# Altium PCB mini-ET.PcbDoc (part 1 of 2)
Units mil, origin at the board's own origin, x right, y up, seen from the top; angles counter-clockwise.
Board outline 6299 x 3937 mil, 4 copper layers (TopLayer, Gnd, Power, BottomLayer); 129 components, 151 nets, 650 pads, 100 vias.
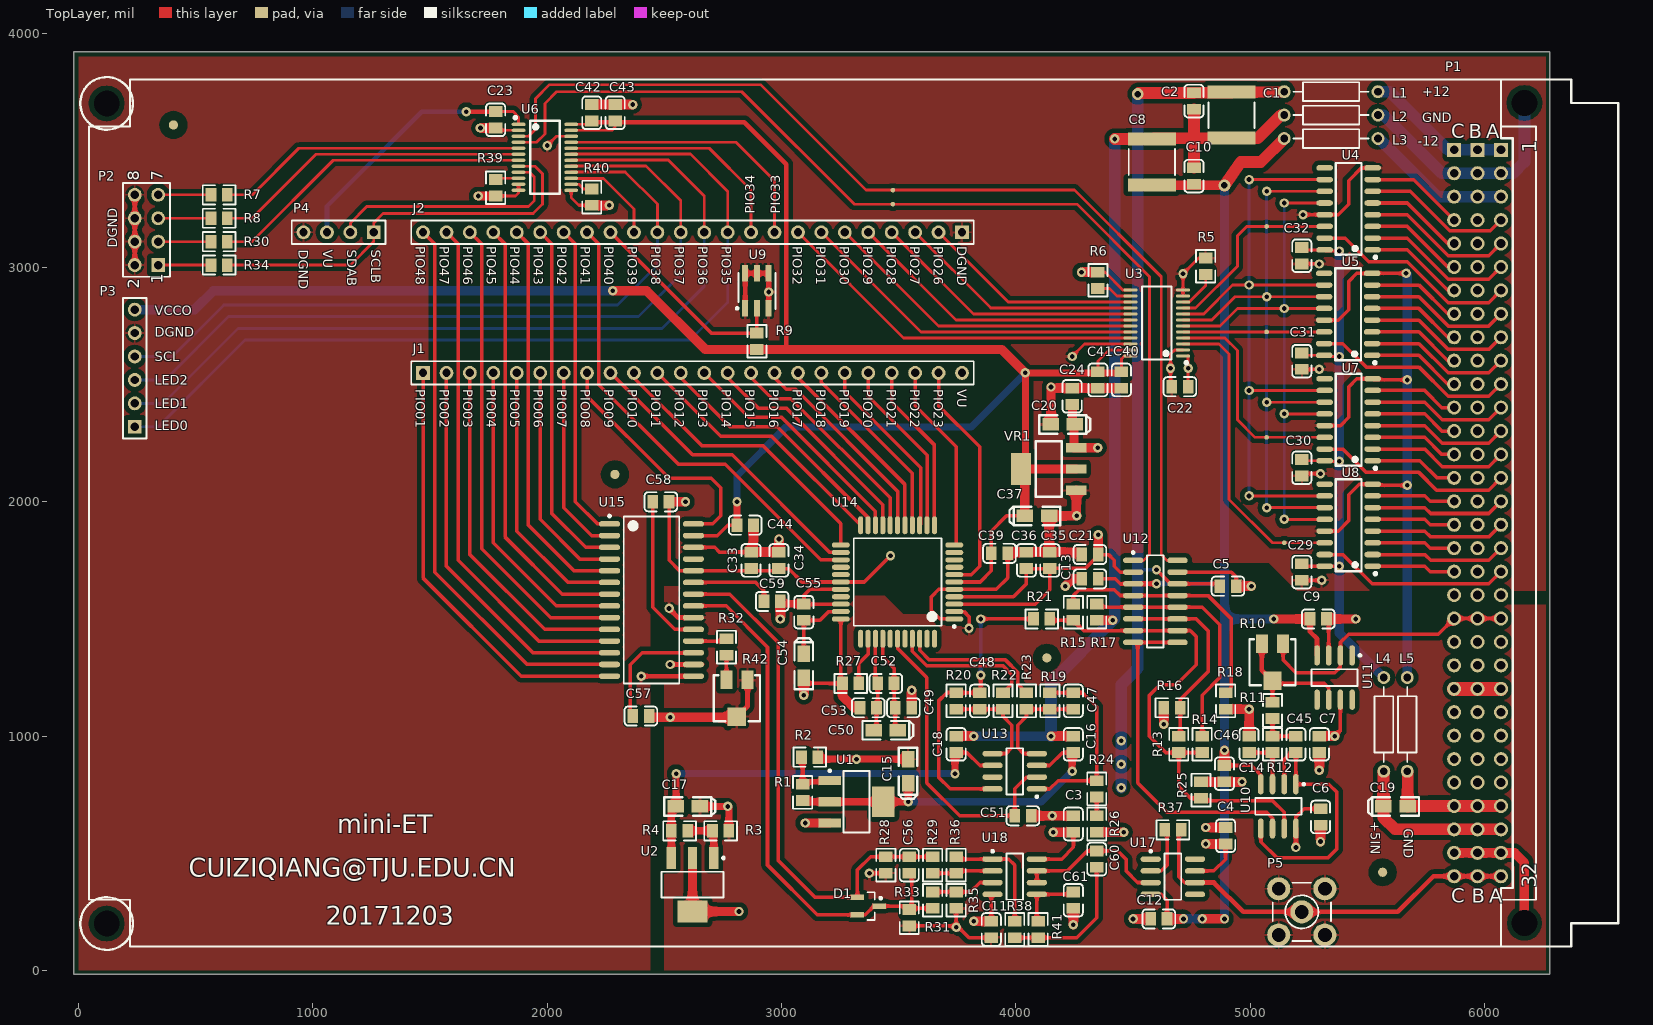
[diagram p0: TopLayer view]
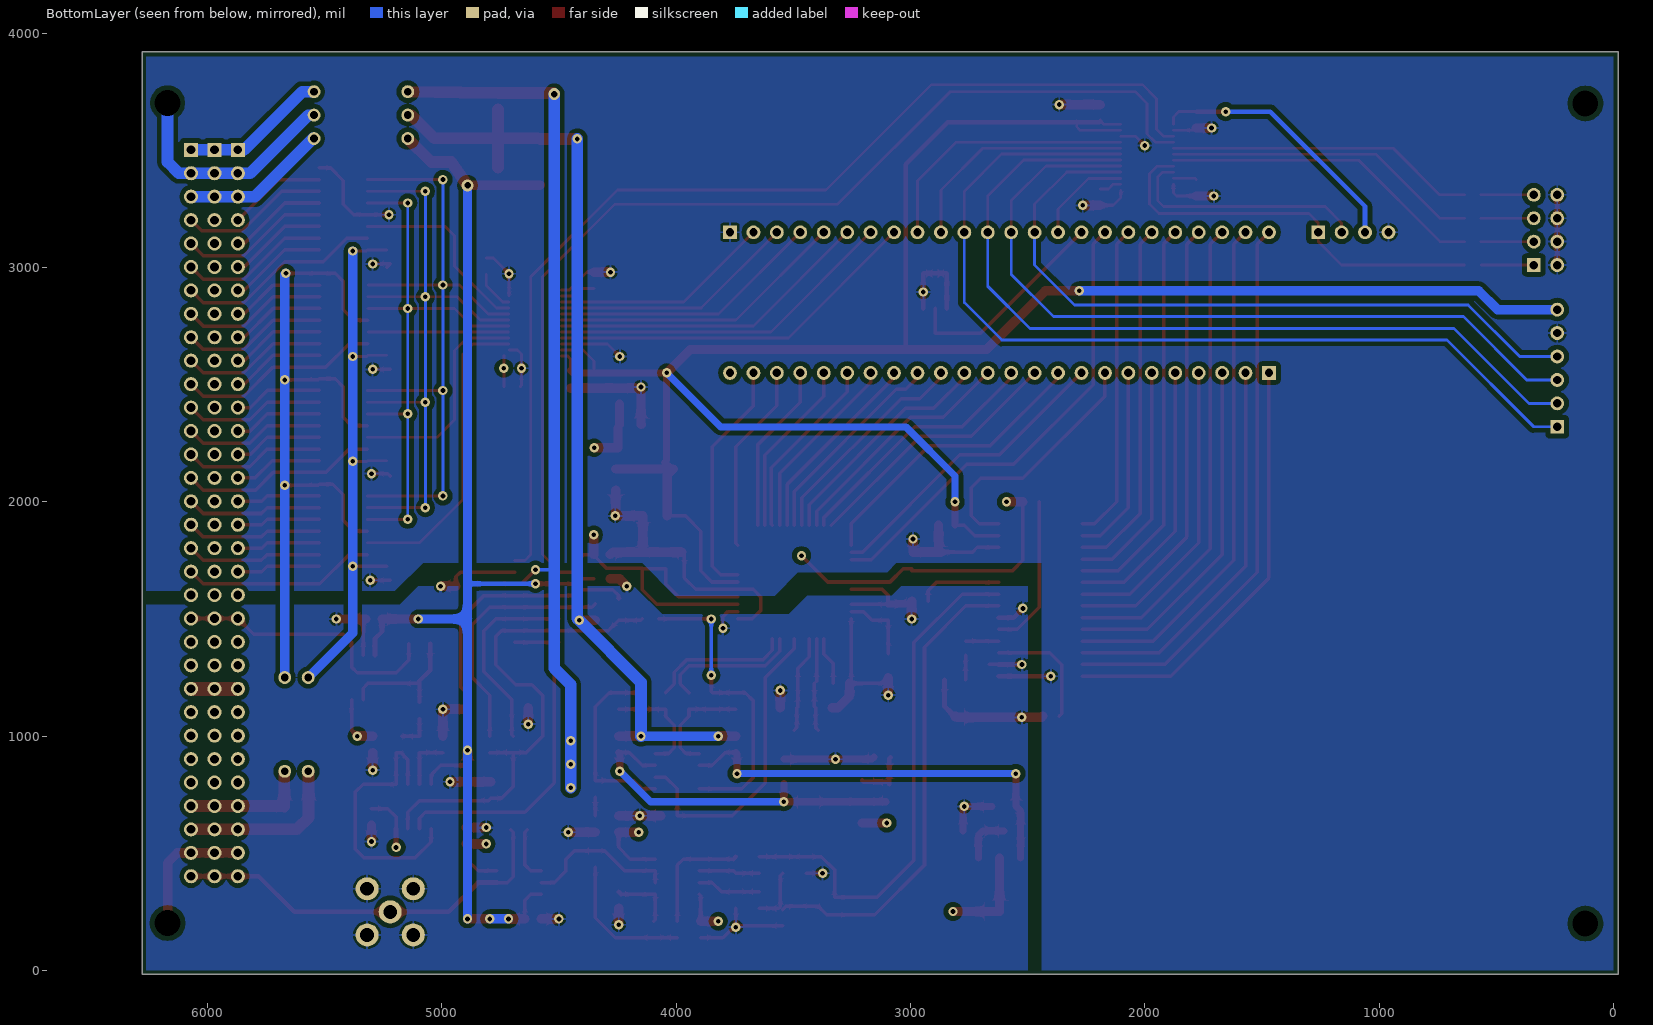
[diagram p1: BottomLayer view, seen from below]
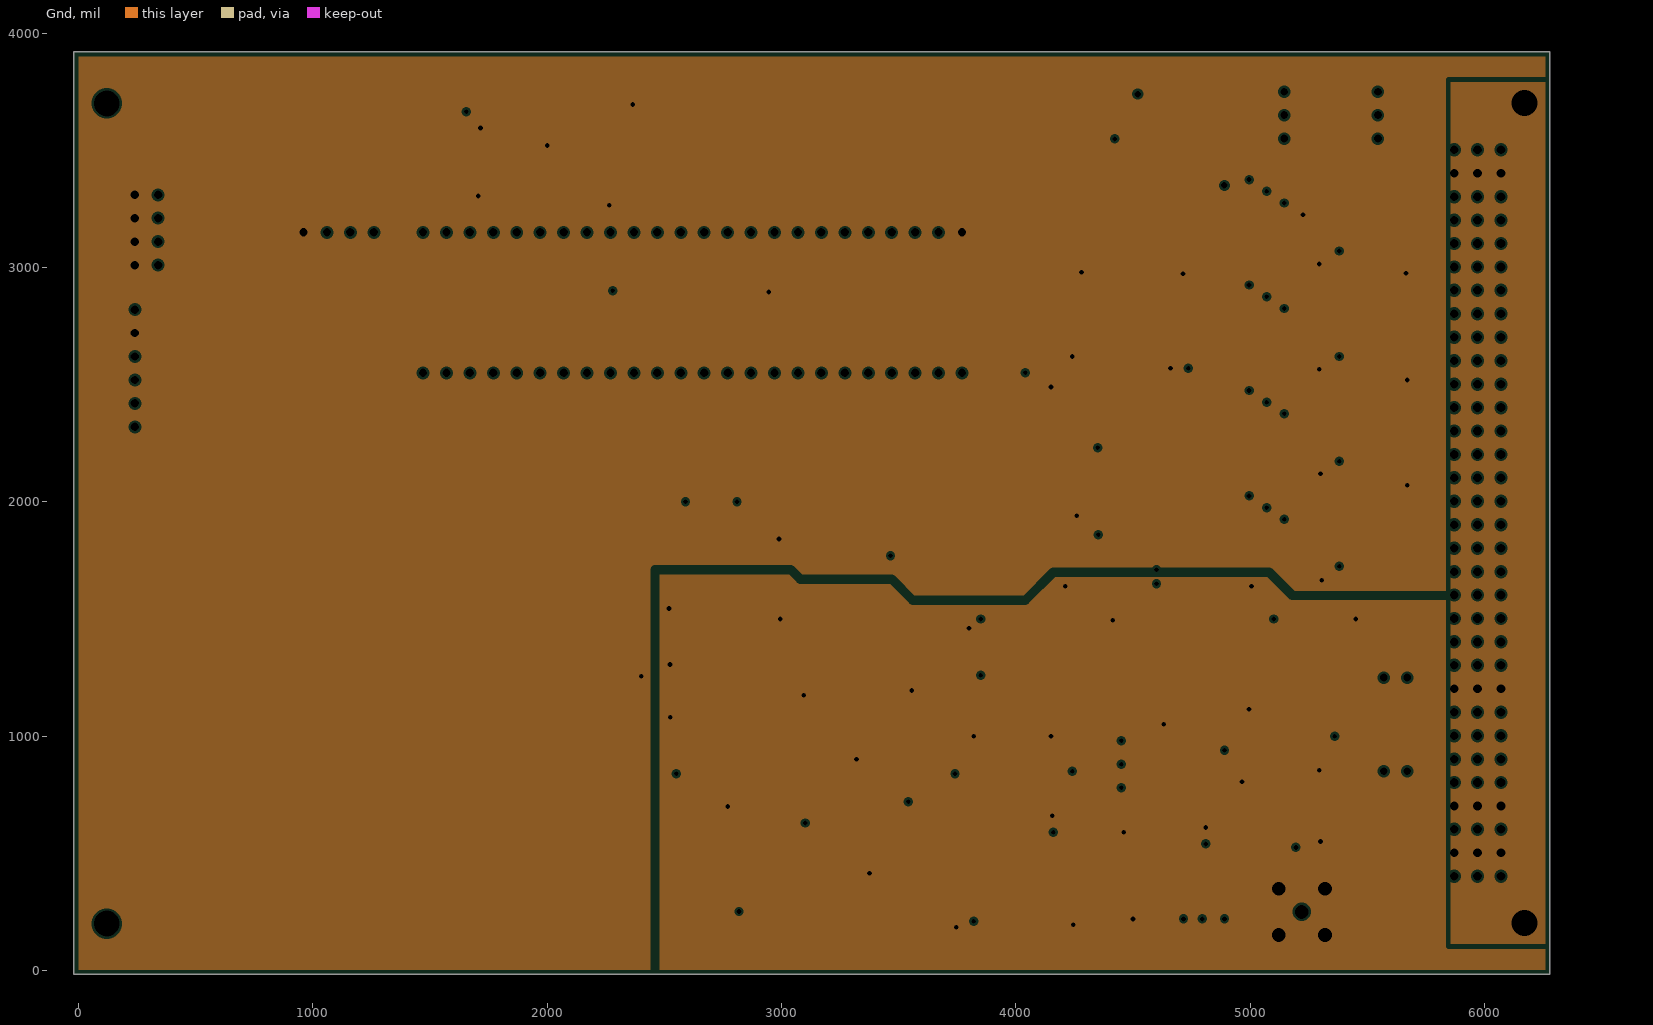
[diagram p2: Gnd, clearances drawn from the general rule]
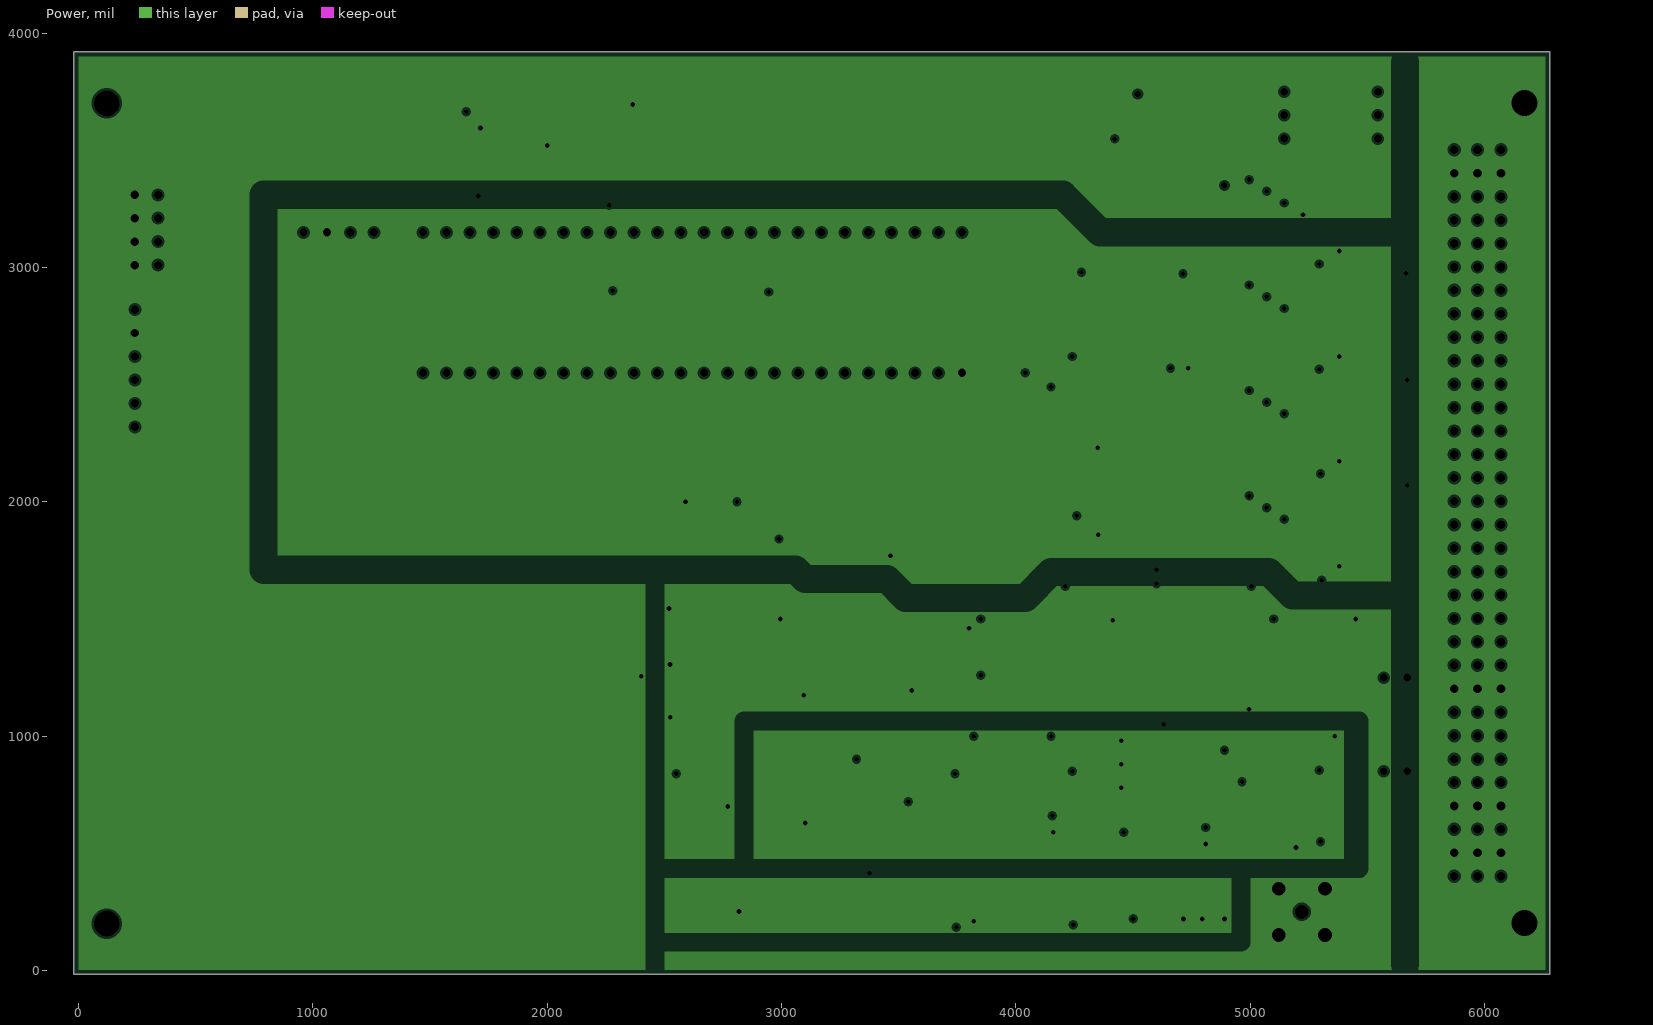
[diagram p3: Power, clearances drawn from the general rule]
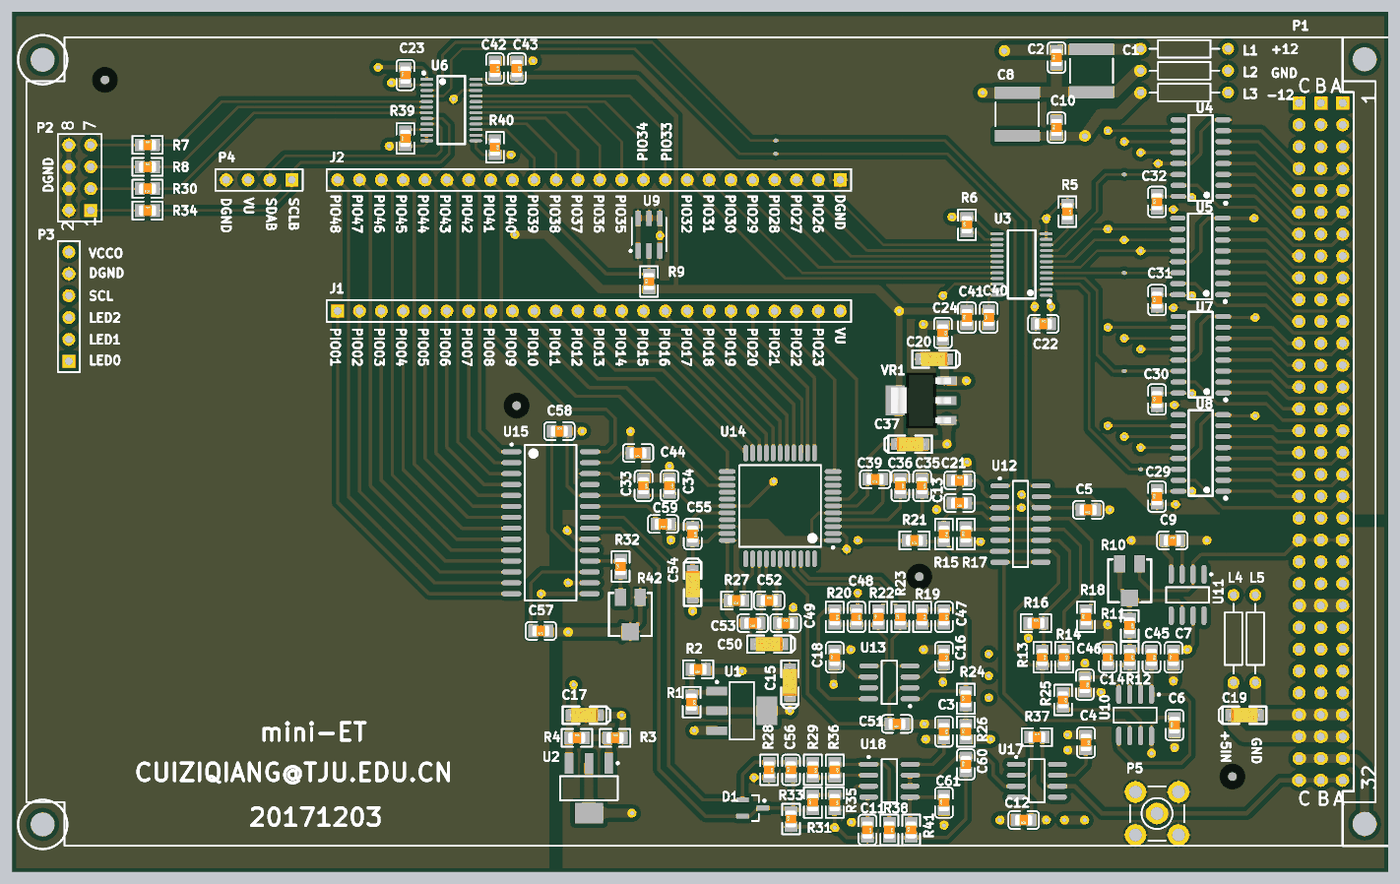
[diagram p5: 3D render of the assembled board from above, using the file's embedded part models]

## Layer stack, top to bottom
TopSolder: solder mask 0.4, Solder Resist, Dk 3.5
TopLayer: signal copper 1.4
Dielectric1: core 12.6, FR-4, Dk 4.8
Gnd: plane copper 1.4, net (Multiple Nets)
Dielectric6: prepreg 12.6, FR-4, Dk 4.8
Power: plane copper 1.4, net VU
Dielectric5: core 12.6, FR-4, Dk 4.8
BottomLayer: signal copper 1.4
BottomSolder: solder mask 0.4, Solder Resist, Dk 3.5

## Board outline
-20,-17 6279,-17 6279,3920 -20,3920

## Design rules (kind name [scope] priority, off if disabled: settings)
Clearance Clearance_10 [InNamedPolygon('toplayer-DGND')] p1: gap=20
Clearance Clearance_9 [InNamedPolygon('bottomlayer-DGND')] p2: gap=20
Clearance Clearance_8 [InNamedPolygon('bottomlayer-AGND')] p3: gap=20
Clearance Clearance_7 [InNamedPolygon('bottomlayer-AGND')] p4: gap=20
Clearance Clearance_6 [InNamedPolygon('toplayer-AGND')] p5: gap=20
Clearance Clearance_5 [InNamedPolygon('toplayer-AGND')] p6: gap=10
Clearance Clearance_4 [InNamedPolygon('toplayer-AGND')] p7: gap=10
Clearance Clearance_3 [InNamedPolygon('toplayer-DGND')] p8: gap=10
Clearance Clearance_2 [InNamedPolygon('toplayer-AGND')] p9: gap=10
Clearance Clearance_1 [InNamedPolygon('toplayer-DGND')] p10: gap=10
Clearance [All] p11: gap=8
DiffPairsRouting [All] p1: maxlimit=10 minlimit=10 mostfreqgap=10 toplayer_minwidth=15 toplayer_maxwidth=15 toplayer_prefwidth=15 bottomlayer_minwidth=15 bottomlayer_maxwidth=15 bottomlayer_prefwidth=15 maxuncoupledlength=500
FabricationTestPointUsage TestPointUsage [All] p1: valid=0 allowmultiple=FALSE
FabricationTestpoint Testpoint [All] p1: side=3 testpointundercomponent=TRUE minsize=40 maxsize=100 preferedsize=60 minholesize=20 maxholesize=40 preferedholesize=32 testpointgrid=1 allowsidetop=TRUE allowsidebottom=TRUE usegrid=TRUE gridtolerance=0.01
PlaneClearance [All] p1: clearance=10
PlaneConnect [All] p1: planeconnectstyle=Relief reliefexpansion=20 reliefentries=4 reliefconductorwidth=10 reliefairgap=10
PolygonConnect [All] p1: connectstyle=Relief reliefconductorwidth=10 reliefentries=4 polygonreliefangle="90 Angle" airgapwidth=10
RoutingVias [All] p1: holewidth=20 width=40 viastyle="Through Hole" minholewidth=20 minwidth=30 maxholewidth=40 maxwidth=80
SilkToSolderMaskClearance SilkscreenOverComponentPads [IsPad] p1: minsilkscreentomaskgap=10 clearancetoexposedcopper=TRUE
SolderMaskExpansion [All] p1: expansion=2
Width [All] p1: maxlimit=100 minlimit=10 preferedwidth=10
Width Width_1 [InNetClass('pp')] p2 off: maxlimit=100 minlimit=10 preferedwidth=50
23 further rules are at their usual default settings.

## Classes and differential pairs
component class ET-AIO: c C45 C46 C47 C48 C49 C50 C51 C52 C53 C54 C55 R10 R11 R12 R13 R14 R15 R16 R17 R18 R19 R20 R21 R22 R23 R24 R25 R26 R27 U10 U11 U12 U13 U14
component class ET-IO: J1 J2 P2 P3 P4 R5 R6 R7 R8 R9 R30 R34 R39 R40 U3 U4 U5 U6 U7 U8 U9
component class ET-DAC: C56 C57 C58 C59 C60 C61 D1 P5 R28 R29 R31 R32 R33 R35 R36 R37 R38 R41 R42 U15 U17 U18
component class ET-POWER: C1 C2 C3 C4 C5 C6 C7 C8 C9 C10 C11 C12 C13 C14 C15 C16 C17 C18 C19 C20 C21 C22 C23 C24 C29 C30 C31 C32 C33 C34 C35 C36 C37 C39 C40 C41 C42 C43 C44 L1 L2 L3 L4 L5 P1 R1 R2 R3 R4 U1 U2 VR1
differential pair VIN: +VIN_P -VIN_N
differential pair OUT: +OUT_P -OUT_N

## Components (designator, comment, footprint, x,y, rotation, side; value= is the part's Value field where it differs from the comment)
C1 "Cap Pol3" 2220 4920,3650 r270 top
C2 "100nF(104) 10% 50V" LC-0805_C 4760,3710 r90 top
C3 "100nF(104) 10% 50V" LC-0805_C 4245,625 r270 top
C4 "100nF(104) 10% 50V" LC-0805_C 4895,575 r270 top
C5 "100nF(104) 10% 50V" LC-0805_C 4905.04,1640 r180 top
C6 "100nF(104) 10% 50V" LC-0805_C 5300,654.96 r90 top
C7 "100nF(104) 10% 50V" LC-0805_C 5295,964.96 r90 top
C8 "Cap Pol3" 2220 4580,3450 r270 top
C9 "100nF(104) 10% 50V" LC-0805_C 5290.04,1500 r0 top
C10 "100nF(104) 10% 50V" LC-0805_C 4760,3390 r90 top
C11 "100nF(104) 10% 50V" LC-0805_C 3895,175 r270 top
C12 "100nF(104) 10% 50V" LC-0805_C 4610,220 r180 top
C13 "100nF(104) 10% 50V" LC-0805_C 4316.06,1671.06 r180 top
C14 "100nF(104) 10% 50V" LC-0805_C 4890,840 r270 top
C15 "10uF (106) ±10% 16V" LC-CASE-A_3216 3540,850 r270 top
C16 "100nF(104) 10% 50V" LC-0805_C 4245,964.96 r270 top
C17 "10uF (106) ±10% 16V" LC-CASE-A_3216 2600,700 r0 top
C18 "100nF(104) 10% 50V" LC-0805_C 3745,964.96 r90 top
C19 "10uF (106) ±10% 16V" LC-CASE-A_3216 5620,700 r180 top
C20 "10uF (106) ±10% 16V" LC-CASE-A_3216 4200,2330 r0 top
C21 "100nF(104) 10% 50V" LC-0805_C 4316.06,1775 r0 top
C22 "100nF(104) 10% 50V" LC-0805_C 4700,2491.06 r0 top
C23 "100nF(104) 10% 50V" LC-0805_C 1780,3630 r90 top
C24 "100nF(104) 10% 50V" LC-0805_C 4240,2450 r270 top
C29 "100nF(104) 10% 50V" LC-0805_C 5220,1700 r90 top
C30 "100nF(104) 10% 50V" LC-0805_C 5220,2145.04 r90 top
C31 "100nF(104) 10% 50V" LC-0805_C 5220,2600 r90 top
C32 "100nF(104) 10% 50V" LC-0805_C 5220,3050 r90 top
C33 "100nF(104) 10% 50V" LC-0805_C 2870,1750 r270 top
C34 "100nF(104) 10% 50V" LC-0805_C 2988.9,1750 r270 top
C35 "100nF(104) 10% 50V" LC-0805_C 4145,1750 r270 top
C36 "100nF(104) 10% 50V" LC-0805_C 4045,1750 r270 top
C37 "10uF (106) ±10% 16V" LC-CASE-A_3216 4090,1940 r180 top
C39 "100nF(104) 10% 50V" LC-0805_C 3930,1780 r180 top
C40 "100nF(104) 10% 50V" LC-0805_C 4450,2520 r90 top
C41 "100nF(104) 10% 50V" LC-0805_C 4350,2520 r90 top
C42 "100nF(104) 10% 50V" LC-0805_C 2190,3660 r270 top
C43 "100nF(104) 10% 50V" LC-0805_C 2290,3660 r270 top
C44 "100nF(104) 10% 50V" LC-0805_C 2845,1900 r180 top
C45 "10pF (100) 5% 50V" LC-0805_C 5195,964.96 r270 top
C46 "10pF (100) 5% 50V" LC-0805_C 4995,964.96 r270 top
C47 "10nF (103) 10% 50V" LC-0805_C 4245,1150 r270 top
C48 "10nF (103) 10% 50V" LC-0805_C 3845,1150 r270 top
C49 "100nF(104) 10% 50V" LC-0805_C 3520,1121.06 r0 top
C50 "10uF (106) ±10% 16V" LC-CASE-A_3216 3445,1025 r0 top
C51 "100nF(104) 10% 50V" LC-0805_C 4030,660 r180 top
C52 "100nF(104) 10% 50V" LC-0805_C 3445,1225 r0 top
C53 "100nF(104) 10% 50V" LC-0805_C 3370,1121.06 r180 top
C54 "10uF (106) ±10% 16V" LC-CASE-A_3216 3095,1300 r90 top
C55 "100nF(104) 10% 50V" LC-0805_C 3095,1528.94 r270 top
C56 "22pF (220) 5% 50V" LC-0805_C 3545,450 r90 top
C57 "100nF(104) 10% 50V" LC-0805_C 2400,1085.83 r180 top
C58 "100nF(104) 10% 50V" LC-0805_C 2484.96,2000 r0 top
C59 "100nF(104) 10% 50V" LC-0805_C 2959.96,1575 r180 top
C60 "10pF (100) 5% 50V" LC-0805_C 4345,475 r90 top
C61 "10pF (100) 5% 50V" LC-0805_C 4245,300 r90 top
D1 "1PS89SB74" SOT23_M 3370,275 r0 top
J1 "Header 24" HDR1X24 1470,2550 r0 top
J2 "Header 24" HDR1X24 3770,3150 r180 top
L1 "Inductor Adj" AXIAL-0.4 5345,3750 r180 top
L2 "Inductor Adj" AXIAL-0.4 5345,3650 r180 top
L3 "Inductor Adj" AXIAL-0.4 5345,3550 r180 top
L4 "Inductor Adj" AXIAL-0.4 5570,1050 r90 top
L5 "Inductor Adj" AXIAL-0.4 5670,1050 r90 top
P1 "CNVME96" CNVME96 6070,3502 r90 top locked
P2 "Header 4X2" HDR2X4 340,3010 r90 top
P3 "Header 6" HDR1X6 240,2320 r90 top
P4 "Header 4" HDR1X4 1260,3150 r180 top
P5 "SMB" SMB_V-RJ45 5220,250 r0 top
R1 "100Ω (1000) ±1%" LC-0805_R 3090,760 r270 top
R2 "300Ω (3000) ±1%" LC-0805_R 3120,910 r180 top
R3 "300Ω (3000) ±1%" LC-0805_R 2740,596.06 r0 top
R4 "100Ω (1000) ±1%" LC-0805_R 2564.96,596.06 r0 top
R5 "0Ω (0R0) ±1%" LC-0805_R 4810,3005.04 r270 top
R6 "0Ω (0R0) ±1%" LC-0805_R 4350,2945.04 r90 top
R7 "1KΩ (1001) ±1%" LC-0805_R 600,3310 r0 top
R8 "1KΩ (1001) ±1%" LC-0805_R 600,3210 r0 top
R9 "1KΩ (1001) ±1%" LC-0805_R 2895,2685 r90 top
R10 "2K" POT4MM-2 5095,1315 r270 top
R11 "33KΩ (3302) ±1%" LC-0805_R 5095,1110 r270 top
R12 "33KΩ (3302) ±1%" LC-0805_R 5095,964.96 r270 top
R13 "200Ω (2000) ±1%" LC-0805_R 4695,964.96 r270 top
R14 "1.5KΩ (1501) ±1%" LC-0805_R 4795,964.96 r270 top
R15 "3KΩ (3001) ±1%" LC-0805_R 4245,1528.94 r270 top
R16 "200Ω (2000) ±1%" LC-0805_R 4666.06,1121.06 r0 top
R17 "510Ω (5100) ±1%" LC-0805_R 4345,1528.94 r90 top
R18 "200Ω (2000) ±1%" LC-0805_R 4895,1150 r90 top
R19 "510Ω (5100) ±1%" LC-0805_R 4145,1150 r270 top
R20 "510Ω (5100) ±1%" LC-0805_R 3745,1150 r270 top
R21 "510Ω (5100) ±1%" LC-0805_R 4109.96,1500 r180 top
R22 "49.9Ω (49R9) ±1%" LC-0805_R 3945,1150 r90 top
R23 "49.9Ω (49R9) ±1%" LC-0805_R 4045,1150 r90 top
R24 "510Ω (5100) ±1%" LC-0805_R 4345,775 r90 top
R25 "49.9Ω (49R9) ±1%" LC-0805_R 4790,770 r270 top
R26 "15Ω (15R0) ±1%" LC-0805_R 4345,625 r90 top
R27 "2KΩ (2001) ±1%" LC-0805_R 3295,1225 r180 top
R28 "49.9Ω (49R9) ±1%" LC-0805_R 3445,450 r270 top
R29 "100Ω (1000) ±1%" LC-0805_R 3645,450 r270 top
R30 "1KΩ (1001) ±1%" LC-0805_R 600,3110 r180 top
R31 "100Ω (1000) ±1%" LC-0805_R 3645,300 r90 top
R32 "2KΩ (2001) ±1%" LC-0805_R 2765,1380 r90 top
R33 "49.9Ω (49R9) ±1%" LC-0805_R 3545,225 r90 top
R34 "1KΩ (1001) ±1%" LC-0805_R 600,3010 r0 top
R35 "1KΩ (1001) ±1%" LC-0805_R 3745,300 r270 top
R36 "1KΩ (1001) ±1%" LC-0805_R 3745,450 r270 top
R37 "510Ω (5100) ±1%" LC-0805_R 4670,600 r0 top
R38 "33KΩ (3302) ±1%" LC-0805_R 3995,175 r270 top
R39 "0Ω (0R0) ±1%" LC-0805_R 1780,3340 r90 top
R40 "0Ω (0R0) ±1%" LC-0805_R 2190,3300 r270 top
R41 "33KΩ (3302) ±1%" LC-0805_R 4095,175 r90 top
R42 "20K" POT4MM-2 2809.72,1161.26 r270 top
U1 "LM317AEMP/NOPB" MP04A_N 3320,720 r0 top
U2 "LM337IMP/NOPB" MP04A_N 2620,365.83 r270 top
U3 "SN74LVC4245APWRG4" LC-TSSOP-24 4601,2763 r90 top
U4 "74HC595D" LC-SOIC-16_150mil 5420,3250 r90 top
U5 "74HC595D" LC-SOIC-16_150mil 5417.64,2800 r90 top
U6 "SN74LVC4245APWRG4" LC-TSSOP-24 1990,3470 r270 top
U7 "74HC595D" LC-SOIC-16_150mil 5420,2350 r90 top
U8 "74HC595D" LC-SOIC-16_150mil 5420,1900 r90 top
U9 "DS2432P" TSOC6 2895,2900 r0 top
U10 "AD8066AR" SO-8_N 5120,700 r270 top
U11 "AD817AR" SO-8_N 5360,1250 r270 top
U12 "MAX309ESE" NSO16_N 4595,1575 r0 top
U13 "AD8138ARZ" SO-8_N 3995,850 r180 top
U14 "AD9240AS" S-44-MQFP_N 3495,1657.68 r180 top
U15 "AD9764ARZ" RW-28_N 2445,1580.71 r0 top
U17 "AD817AR" SO-8_N 4670,400 r0 top
U18 "AD8066AR" SO-8_N 3995,400 r0 top
VR1 "AMS1117-3.3" LC-SOT-223 4140,2140 r0 top

## Footprints (in the part's own frame and the unit in brackets; to place one, negate y for a bottom-side part, rotate by r counter-clockwise, add the part's x,y. Pads: shape width x height; smd on the part's side, far side on the other; paste and mask are expansions set on the pad)
2220 [mm] "Chip Capacitor, Body 5.7x5.0mm, IPC High Density"
  rect 1.4x5.2 smd: 1(-2.5,0) 2(2.5,0)
  silkscreen extent -1.4,-2.5 1.4,2.5, body extent -2.95,-2.63 2.95,2.63, height 1.4
AXIAL-0.4 [mm] "Axial Device, Thru-Hole; 2 Leads; 0.4 in Pin Spacing"
  round 1.4 hole 0.85: 1(-5.08,0) 2(5.08,0)
  silkscreen extent -4.06,-1.02 4.06,1.02
CNVME96 [mil]
  round 50 hole 110: 97(200,-100) 98(-3300,-100)
  rect 60x60 / inner round 60 / far side rect 60x60 hole 37: A1(0,0) B1(0,100) C1(0,200)
  round 60 hole 37: A2(-100,0) A3(-200,0) A4(-300,0) A5(-400,0) A6(-500,0) A7(-600,0) A8(-700,0) A9(-800,0) A10(-900,0) A11(-1000,0) A12(-1100,0) A13(-1200,0) A14(-1300,0) A15(-1400,0) A16(-1500,0) A17(-1600,0) A18(-1700,0) A19(-1800,0) A20(-1900,0) A21(-2000,0) A22(-2100,0) A23(-2200,0) A24(-2300,0) A25(-2400,0) A26(-2500,0) A27(-2600,0) A28(-2700,0) A29(-2800,0) A30(-2900,0) A31(-3000,0) A32(-3100,0) B2(-100,100) B3(-200,100) B4(-300,100) B5(-400,100) B6(-500,100) B7(-600,100) B8(-700,100) B9(-800,100) B10(-900,100) B11(-1000,100) B12(-1100,100) B13(-1200,100) B14(-1300,100) B15(-1400,100) B16(-1500,100) B17(-1600,100) B18(-1700,100) B19(-1800,100) B20(-1900,100) B21(-2000,100) B22(-2100,100) B23(-2200,100) B24(-2300,100) B25(-2400,100) B26(-2500,100) B27(-2600,100) B28(-2700,100) B29(-2800,100) B30(-2900,100) B31(-3000,100) B32(-3100,100) C2(-100,200) C3(-200,200) C4(-300,200) C5(-400,200) C6(-500,200) C7(-600,200) C8(-700,200) C9(-800,200) C10(-900,200) C11(-1000,200) C12(-1100,200) C13(-1200,200) C14(-1300,200) C15(-1400,200) C16(-1500,200) C17(-1600,200) C18(-1700,200) C19(-1800,200) C20(-1900,200) C21(-2000,200) C22(-2100,200) C23(-2200,200) C24(-2300,200) C25(-2400,200) C26(-2500,200) C27(-2600,200) C28(-2700,200) C29(-2800,200) C30(-2900,200) C31(-3000,200) C32(-3100,200)
  silkscreen extent -3400,-500 300,0
HDR1X4 [mm] "Connector; Header; 4 Position"
  rect 1.5x1.5 hole 0.9: 1(0,0)
  round 1.5 hole 0.9: 2(2.54,0) 3(5.08,0) 4(7.62,0)
  silkscreen extent -1.27,-1.27 8.89,1.27
HDR1X6 [mm] "Connector; Header; 6 Position"
  rect 1.5x1.5 hole 0.9: 1(0,0)
  round 1.5 hole 0.9: 2(2.54,0) 3(5.08,0) 4(7.62,0) 5(10.16,0) 6(12.7,0)
  silkscreen extent -1.27,-1.27 13.97,1.27
HDR1X24 [mm] "Connector; Header; 24 Position"
  rect 1.5x1.5 hole 0.9: 1(0,0)
  round 1.5 hole 0.9: 2(2.54,0) 3(5.08,0) 4(7.62,0) 5(10.16,0) 6(12.7,0) 7(15.24,0) 8(17.78,0) 9(20.32,0) 10(22.86,0) 11(25.4,0) 12(27.94,0) 13(30.48,0) 14(33.02,0) 15(35.56,0) 16(38.1,0) 17(40.64,0) 18(43.18,0) 19(45.72,0) 20(48.26,0) 21(50.8,0) 22(53.34,0) 23(55.88,0) 24(58.42,0)
  silkscreen extent -1.27,-1.27 59.69,1.27
HDR2X4 [mm] "Connector; Header; 4x2 Position"
  rect 1.5x1.5 hole 0.9: 1(0,0)
  round 1.5 hole 0.9: 2(0,2.54) 3(2.54,0) 4(2.54,2.54) 5(5.08,0) 6(5.08,2.54) 7(7.62,0) 8(7.62,2.54)
  silkscreen extent -1.27,-1.27 8.89,3.81
LC-0805_C [mm]
  rect 1.16x1.47 smd: 1(-0.89,0) 2(0.89,0)
  silkscreen extent -1.77,-1.04 1.77,1.04, body extent -1,-0.62 1,0.63, height 0.77
LC-0805_R [mm]
  rect 1.16x1.47 smd: 1(-0.89,0) 2(0.89,0)
  silkscreen extent -1.77,-1.04 1.77,1.03, body extent -1,-0.65 1,0.65, height 0.77
LC-CASE-A_3216 [mm]
  rect 1.8x1.35 smd: 1(1.31,0) 2(-1.31,0)
  silkscreen extent -2.54,-1 2.97,1, body extent -1.7,-0.84 1.7,0.84, height 1.71
LC-SOIC-16_150mil [mm]
  oval 0.6x1.8 smd: 1(-4.445,-2.6) 2(-3.175,-2.6) 3(-1.905,-2.6) 4(-0.635,-2.6) 5(0.635,-2.6) 6(1.905,-2.6) 7(3.175,-2.6) 8(4.445,-2.6) 9(4.445,2.6) 10(3.175,2.6) 11(1.905,2.6) 12(0.635,2.6) 13(-0.635,2.6) 14(-1.905,2.6) 15(-3.175,2.6) 16(-4.445,2.6)
  silkscreen extent -5.4,-3.05 4.97,1.4
LC-SOT-223 [mm]
  rect 2.2x1 smd: 1(3,-2.3) 2(3,0) 3(3,2.3)
  rect 2.2x3.5 smd: 2(-3,0)
  silkscreen extent -1.4,-3 1.4,3, body extent -3.49,-3.24 3.49,3.24, height 1.64
LC-TSSOP-24 [mm]
  oval 0.35x1.5 smd: 1(-3.575,-2.85) 2(-2.925,-2.85) 3(-2.275,-2.85) 4(-1.625,-2.85) 5(-0.975,-2.85) 6(-0.325,-2.85) 7(0.325,-2.85) 8(0.975,-2.85) 9(1.625,-2.85) 10(2.275,-2.85) 11(2.925,-2.85) 12(3.575,-2.85) 13(3.575,2.85) 14(2.925,2.85) 15(2.275,2.85) 16(1.625,2.85) 17(0.975,2.85) 18(0.325,2.85) 19(-0.325,2.85) 20(-0.975,2.85) 21(-1.625,2.85) 22(-2.275,2.85) 23(-2.925,2.85) 24(-3.575,2.85)
  silkscreen extent -4.45,-3.35 3.95,1.6
MP04A_N [mm] "SOT223, 4-Leads, Body 6.5x3.5mm, Pitch 2.3mm, Lead Span 7mm, IPC Medium Density"
  rect 2.4x1 smd: 1(-2.9,2.3) 2(-2.9,0) 3(-2.9,-2.3)
  rect 2.4x3.3 smd: 4(2.9,0)
  silkscreen extent -3.02,-3.35 1.4,3.47, body extent -1.85,-3.35 1.85,3.35, height 1.8
NSO16_N [mm] "SOIC, 16-Leads, Body 9.9x3.9mm, Pitch 1.27mm, IPC Medium Density"
  oval 2.2x0.6 smd: 1(-2.4,4.445) 2(-2.4,3.175) 3(-2.4,1.905) 4(-2.4,0.635) 5(-2.4,-0.635) 6(-2.4,-1.905) 7(-2.4,-3.175) 8(-2.4,-4.445) 9(2.4,-4.445) 10(2.4,-3.175) 11(2.4,-1.905) 12(2.4,-0.635) 13(2.4,0.635) 14(2.4,1.905) 15(2.4,3.175) 16(2.4,4.445)
  silkscreen extent -2.52,-5 0.9,5.42, body extent -2,-5 2,5, height 1.75
POT4MM-2 [mm] "Square Trimming Potentiometer"
  rect 2x1.3 smd: CCW(-2,-1.15) CW(-2,1.15)
  rect 2x2 smd: W(2,0)
  silkscreen extent -2.5,-2.5 2.5,2.5
RW-28_N [mm] "SOIC, 28-Leads, Body 17.9x7.5mm, Pitch 1.27mm, IPC Medium Density"
  oval 2.3x0.6 smd: 1(-4.55,8.255) 2(-4.55,6.985) 3(-4.55,5.715) 4(-4.55,4.445) 5(-4.55,3.175) 6(-4.55,1.905) 7(-4.55,0.635) 8(-4.55,-0.635) 9(-4.55,-1.905) 10(-4.55,-3.175) 11(-4.55,-4.445) 12(-4.55,-5.715) 13(-4.55,-6.985) 14(-4.55,-8.255) 15(4.55,-8.255) 16(4.55,-6.985) 17(4.55,-5.715) 18(4.55,-4.445) 19(4.55,-3.175) 20(4.55,-1.905) 21(4.55,-0.635) 22(4.55,0.635) 23(4.55,1.905) 24(4.55,3.175) 25(4.55,4.445) 26(4.55,5.715) 27(4.55,6.985) 28(4.55,8.255)
  silkscreen extent -4.67,-9.05 3,9.23, body extent -3.8,-9.05 3.8,9.05, height 2.65
S-44-MQFP_N [mm] "QFP, 44-Leads, Body 10x10mm, Pitch 0.8mm, IPC Medium Density"
  oval 1.95x0.55 smd: 1(-6.15,4) 2(-6.15,3.2) 3(-6.15,2.4) 4(-6.15,1.6) 5(-6.15,0.8) 6(-6.15,0) 7(-6.15,-0.8) 8(-6.15,-1.6) 9(-6.15,-2.4) 10(-6.15,-3.2) 11(-6.15,-4) 23(6.15,-4) 24(6.15,-3.2) 25(6.15,-2.4) 26(6.15,-1.6) 27(6.15,-0.8) 28(6.15,0) 29(6.15,0.8) 30(6.15,1.6) 31(6.15,2.4) 32(6.15,3.2) 33(6.15,4)
  oval 0.55x1.95 smd: 12(-4,-6.15) 13(-3.2,-6.15) 14(-2.4,-6.15) 15(-1.6,-6.15) 16(-0.8,-6.15) 17(0,-6.15) 18(0.8,-6.15) 19(1.6,-6.15) 20(2.4,-6.15) 21(3.2,-6.15) 22(4,-6.15) 34(4,6.15) 35(3.2,6.15) 36(2.4,6.15) 37(1.6,6.15) 38(0.8,6.15) 39(0,6.15) 40(-0.8,6.15) 41(-1.6,6.15) 42(-2.4,6.15) 43(-3.2,6.15) 44(-4,6.15)
  silkscreen extent -6.28,-4.75 4.75,4.95, body extent -5,-5 5,5, height 2.45
SMB_V-RJ45 [mm] "Connector; SMB Straight"
  round 2.5 hole 1.5: 1(0,0) 2(-2.5,-2.5) 2(-2.5,2.5) 2(2.5,-2.5) 2(2.5,2.5)
  silkscreen extent -3.15,-3.15 3.15,3.15
SO-8_N [mm] "SOIC, 8-Leads, Body 4.9x3.9mm, Pitch 1.27mm, IPC Medium Density"
  oval 2.2x0.6 smd: 1(-2.4,1.905) 2(-2.4,0.635) 3(-2.4,-0.635) 4(-2.4,-1.905) 5(2.4,-1.905) 6(2.4,-0.635) 7(2.4,0.635) 8(2.4,1.905)
  silkscreen extent -2.52,-2.5 0.9,2.88, body extent -1.95,-2.45 1.95,2.45, height 1.75
SOT23_M [mm] "SOT23, 3-Leads, Body 2.9x1.3mm, Pitch 0.95mm, Lead Span 2.3mm - Reverse Pinning, IPC Low Density"
  rect 1.45x0.6 smd: 1(1.175,0) 2(-1.175,-0.95) 3(-1.175,0.95)
  silkscreen extent -0.1,-1.5 1.48,1.5, body extent -0.7,-1.5 0.7,1.5, height 1.1
TSOC6 [mm] "Small Outline; 6 C-Bend Leads; Body Width 3.8 mm; Pitch 1.27 mm"
  rect 0.65x1.8 smd: 1(-1.27,-1.9) 2(0,-1.9) 3(1.27,-1.9) 4(1.27,1.9) 5(0,1.9) 6(-1.27,1.9)
  silkscreen extent -2.27,-2.02 2,1.95

## Part data
C1 C8: "Polarized Capacitor (Surface Mount)"
C2 C3 C4 C5 C6 C7 C9 C10 C11 C12 C13 C14 C16 C18 C21 C22 C23 C24 C29 C30 C31 C32 C33 C34 C35 C36 C39 C40 C41 C42 C43 C44 C49 C51 C52 C53 C55 C57 C58 C59: library part "0805 100nF(104) 10% 50V", "贴片电容"
C15 C17 C19 C20 C37 C50 C54: library part "3216 10uF (106) 10% 16V", "钽电容"
C45 C46 C60 C61: library part "0805 10pF (100) 5% 50V", "贴片电容"
C47 C48: library part "0805 10nF (103) 10% 50V", "贴片电容"
C56: library part "0805 22pF (220) 5% 50V", "贴片电容"
D1: "Schottky Barrier Double Diode"
J1 J2: "Header, 24-Pin"
L1 L2 L3 L4 L5: "Adjustable Inductor"
P1: "96-Pin Connector (3x32 2.54mm grid)"
P2: "Header, 4-Pin, Dual row"
P3: "Header, 6-Pin"
P4: "Header, 4-Pin"
P5: "SMB Straight Connector"
R1 R4 R29 R31: library part "0805 100Ω (1000) 1%", "贴片电阻"
R2 R3: library part "0805 300Ω (3000) 1%", "贴片电阻"
R5 R6 R39 R40: library part "0805 0Ω (0R0) 1%", "贴片电阻"
R7 R8 R9 R30 R34 R35 R36: library part "0805 1KΩ (1001) 1%", "贴片电阻"
R10 R42: library part "RPot SM", "Square Trimming Potentiometer"
R11 R12 R38 R41: library part "0805 33KΩ (3302) 1%", "贴片电阻"
R13 R16 R18: library part "0805 200Ω (2000) 1%", "贴片电阻"
R14: library part "0805 1.5KΩ (1501) 1%", "贴片电阻"
R15: library part "0805 3KΩ (3001) 1%", "贴片电阻"
R17 R19 R20 R21 R24 R37: library part "0805 510Ω (5100) 1%", "贴片电阻"
R22 R23 R25 R28 R33: library part "0805 49.9Ω (49R9) 1%", "贴片电阻"
R26: library part "0805 15Ω (15R0) 1%", "贴片电阻"
R27 R32: library part "0805 2KΩ (2001) 1%", "贴片电阻"
U1: "3-Terminal Adjustable Regulator, 4-pin SOT-223, Pb-Free"
U2: "3-Terminal Adjustable Negative Regulator, 4-pin SOT-223, Pb-Free"
U3 U4 U5 U6 U7 U8: "74系列逻辑芯片"
U9: library part DS2430AP, "256-Bit 1-Wire EEPROM"
U10 U18: library part AD8056AR, "Low Cost, 300MHz Voltage Feedback Amplifier"
U11 U17: "High-Speed, Low-Power Wide Supply Range Amplifier"
U12: "Precision, Dual 4-Channel, High-Performance, CMOS Analog Multiplexer"
U14: "Complete 14-Bit, 10 MSPS Monolithic A/D Converter, 44-Pin MQFP, Industrial"
U15: "Single 14-Bit TxDAC, 125 Msps, -40 to +85 degC, RW-28, Pb-Free, Tube"
VR1: library part "SOT-223 AMS1117-3.3", "低压差线性稳压(LDO)"

## Free pads (board coordinates)
  round 50 hole 110: 1(120,3700) 2(120,200)
  round 39.37 smd mask+39.37: 1(405,3608) 9(2289,2117) 10(4132,1334) 11(5565,419)
  round 20 smd: 3(5070,3175) 4(5070,2725) 5(5070,2275) 6(5145,1825) 7(3475,3330) 8(3475,3270)

## Via types
v1: diameter 40, hole 20, TopLayer to BottomLayer, 98 vias
v2: diameter 50, hole 28, TopLayer to BottomLayer, 2 vias

## Nets (pads, with @x,y where several pads share a name; then routed paths per layer and width w, separated by ;. In a path a pad name is that pad's centre, name@x,y a point inside that pad or via, vN(x,y) a via of type N, cw(c..) or ccw(c..) an arc to the next point about the centre after c; other vN are vias at no path point)
+5IN: C19.1 L4.1 P1.A30 P1.B30 P1.C30 | length 721.2
  TopLayer w50: L4.1@5570,850 5568.43,848.43 C19.1@5568.43,700 5568.43,651.57 5618,602 P1.C30@5870,602 P1.B30@5970,602 P1.A30@6070,602
+5V: C15.1 C16.2 R1.2 U1.2 U1.4 U13.3 | length 1527.6
  TopLayer w15: U13.3@4089.49,875 4145,875 4199.92,929.92 C16.2@4245,929.92
  TopLayer w30: R1.2@3104.96,720 U1.2@3205.83,720 U1.4@3434.17,720 v1(3540,720) C15.1@3540,798.43 ; v1(4240,850) 4240,924.92 C16.2@4245,929.92
  BottomLayer w30: v1(3540,720) 4110,720 v1(4240,850)
+12: C1.1 C2.2 C3.2 C4.2 C5.2 C6.2 C7.2 L1.2 U1.3 U10.8 U11.7 U12.14 U17.7 U18.8 | length 5213.7
  TopLayer w15: U18.8@4089.49,475 4195,475 4245,525 C3.2@4245,589.96 ; v1(4600,1710) 4660,1650 U12.14@4689.49,1650 C5.2@4880.04,1650 ; U17.7@4764.49,425 4845,425 4895,475 C4.2@4895,539.96 ; U10.8@5195,605.51 5195,655 5230,690 C6.2@5300,690 ; v1(5360,1000) 5385,1025 U11.7@5385,1155.51
  TopLayer w20: v1(5195,525) U10.8@5195,605.51
  TopLayer w40: v1(3100.55,629.45) U1.3@3205.83,629.45 ; v1(4160.04,589.96) C3.2@4245,589.96 ; v1(4810.04,539.96) C4.2@4895,539.96 ; C7.2@5295,1000 v1(5360,1000)
  TopLayer w50: v2(4520,3740) 4524.54,3744.54 4760.01,3744.54 4920.02,3746.81 L1.2@5145,3750
  BottomLayer w15: 4520,1710 v1(4600,1710)
  BottomLayer w50: v1(4450,780) v1(4450,880) v1(4450,980) 4450,1220 4520,1290 4520,1710 v2(4520,3740)
+12IN: L1.1 P1.A1 P1.B1 P1.C1 | length 627.7
  BottomLayer w50: L1.1@5545,3750 5595,3750 5843,3502 P1.C1@5870,3502 P1.B1@5970,3502 P1.A1@6070,3502
-5V: C17.2 C18.1 R4.1 U2.3 U13.6 | length 1828.8
  TopLayer w15: C18.1@3745,929.92 3790.08,929.92 3845,875 U13.6@3900.51,875
  TopLayer w30: U2.3@2529.45,480 2529.45,595.59 R4.1@2529.92,596.06 2529.92,681.5 C17.2@2548.43,700 2550,701.57 v1(2550,840) ; v1(3740,840) 3740,924.92 C18.1@3745,929.92
  BottomLayer w30: v1(2550,840) v1(3740,840)
-12: C8.2 C9.1 C10.1 C11.1 C12.1 C13.1 C14.1 L3.2 U2.2 U2.4 U10.4 U11.4 U12.3 U17.4 U18.4 | length 6169.6
  TopLayer w15: C11.1@3895,210.04 3895,319.49 U18.4@3900.51,325 ; C13.1@4351.1,1671.06 4423.94,1671.06 4445,1650 U12.3@4500.51,1650 ; U17.4@4575.51,325 4620,325 4645,300 4645,235.04 C12.1@4634.96,225 ; C14.1@4890,875.04 5004.96,875.04 5045,835 U10.4@5045,794.49
  TopLayer w20: U12.3@4500.51,1650 v1(4600,1650) ; C9.1@5255,1500 5255,1445 5285,1415 U11.4@5285,1344.49
  TopLayer w40: U2.2@2620,480 U2.4@2620,251.65 v1(2818.35,251.65) ; v1(3820.04,210.04) C11.1@3895,210.04 ; C8.2@4580,3351.57 4581.57,3350 v2(4890,3350) ; C12.1@4645.04,220 v1(4715,220) ; v1(4795,220) v1(4890,220) ; C14.1@4890,875.04 v1(4890,940) ; v1(5100,1500) C9.1@5255,1500
  TopLayer w50: v2(4890,3350) 4960,3450 5045,3450 L3.2@5145,3550
  BottomLayer w20: v1(4600,1650) 4890,1650
  BottomLayer w40: v1(4715,220) v1(4795,220) ; v1(4890,220) v1(4890,940) 4890,1500 ; v2(4890,3350) 4890,1650 4890,1500 ; v1(5100,1500) 4890,1500
-12IN: L3.1 P1.A3 P1.B3 P1.C3 | length 627.7
  BottomLayer w50: L3.1@5545,3550 5550,3550 5798,3302 P1.C3@5870,3302 P1.B3@5970,3302 P1.A3@6070,3302
A0: P1.C12 U7.7 | length 377.9
  TopLayer w15: U7.7@5522.36,2475 5745,2475 5818,2402 P1.C12@5870,2402
A1: P1.A12 U7.6 | length 600.2
  TopLayer w15: U7.6@5522.36,2425 5745,2425 5820,2350 6018,2350 P1.A12@6070,2402
A2: P1.C13 U7.5 | length 377.9
  TopLayer w15: U7.5@5522.36,2375 5745,2375 5818,2302 P1.C13@5870,2302
A3: P1.A13 U7.4 | length 600.2
  TopLayer w15: U7.4@5522.36,2325 5745,2325 5820,2250 6018,2250 P1.A13@6070,2302
A4: P1.C14 U7.3 | length 377.9
  TopLayer w15: U7.3@5522.36,2275 5745,2275 5818,2202 P1.C14@5870,2202
A5: P1.A14 U7.2 | length 600.2
  TopLayer w15: U7.2@5522.36,2225 5745,2225 5820,2150 6018,2150 P1.A14@6070,2202
A6: P1.C15 U7.1 | length 377.9
  TopLayer w15: U7.1@5522.36,2175 5724,2175 5797,2102 P1.C15@5870,2102
A7: P1.A15 U7.15 | length 846.4
  TopLayer w15: U7.15@5317.64,2225 5395,2225 5495,2125 5720,2125 5795,2050 6018,2050 P1.A15@6070,2102
A8: P1.C16 U8.7 | length 357.2
  TopLayer w15: U8.7@5522.36,2025 5745,2025 5768,2002 P1.C16@5870,2002
A9: P1.A16 U8.6 | length 579.5
  TopLayer w15: U8.6@5522.36,1975 5745,1975 5770,1950 6018,1950 P1.A16@6070,2002
A10: P1.C17 U8.5 | length 357.2
  TopLayer w15: U8.5@5522.36,1925 5745,1925 5768,1902 P1.C17@5870,1902
A11: P1.A17 U8.4 | length 579.5
  TopLayer w15: U8.4@5522.36,1875 5745,1875 5770,1850 6018,1850 P1.A17@6070,1902
A12: P1.C18 U8.3 | length 357.2
  TopLayer w15: U8.3@5522.36,1825 5745,1825 5768,1802 P1.C18@5870,1802
A13: P1.A18 U8.2 | length 579.5
  TopLayer w15: U8.2@5522.36,1775 5745,1775 5770,1750 6018,1750 P1.A18@6070,1802
A14: P1.C19 U8.1 | length 357.2
  TopLayer w15: U8.1@5522.36,1725 5745,1725 5768,1702 P1.C19@5870,1702
A15: P1.A19 U8.15 | length 825.7
  TopLayer w15: U8.15@5317.64,1775 5395,1775 5520,1650 6018,1650 P1.A19@6070,1702
ADC: P1.A21 P1.B21 P1.C21 R10.CW U11.2 | length 1179
  TopLayer w15: R10.CW@5140.28,1393.74 5140.28,1324.72 5195,1270 5360,1270 5385,1295 U11.2@5385,1344.49 5385,1400 5420,1435 5803,1435 P1.C21@5870,1502 P1.B21@5970,1502 P1.A21@6070,1502
ADCLK: J1.23 U14.7 | length 1020.2
  TopLayer w15: J1.23@3670,2550 3670,2410 3845,2235 3845,1725 3809.17,1689.17 U14.7@3737.13,1689.17
ADOTR: J2.17 U14.25 | length 2013.3
  TopLayer w15: J2.17@2170,3150 2220,3100 2220,2500 2560,2160 2760,2160 3167.83,1752.17 U14.25@3252.87,1752.17
AGND: C1.2 C2.1 C3.1 C4.1 C5.1 C6.1 C7.1 C8.1 C9.2 C10.2 C11.2 C12.2 C13.2 C14.2 C15.2 C16.1 C17.1 C18.2 C46.1 C49.2 C51.1 C53.2 C54.2 C55.1 C57.1 C59.1 C61.1 L2.2 P5.2 R2.1 R3.2 R16.1 R17.1 R18.1 R25.1 R26.1 R27.2 R28.2 R33.1 R35.2 R42.CW R42.W U11.3 U12.15 U14.2 U14.29 U14.31 U14.33 U15.16 U15.20 | length 9458.2
  TopLayer w15: U15.16@2624.13,1305.71 U15.16@2664.29,1305.71 ; C54.2@3095,1248.43 3118.43,1225 R27.2@3259.96,1225 3252.87,1232.09 U14.33@3252.87,1500.2 ; C55.1@3095,1563.98 C55.1@3095.79,1563.19 ; U14.31@3252.87,1563.19 C55.1@3095.79,1563.19 ; U14.29@3252.87,1626.18 3121.18,1626.18 3095.79,1600.79 C55.1@3095.79,1563.19 ; v1(3374.96,414.96) R28.2@3445,414.96 ; R33.1@3545,189.96 3740.04,189.96 v1(3745,185) ; U14.2@3737.13,1531.69 3778.31,1531.69 3800,1510 v1(3800,1460) ; R35.2@3745,264.96 v1(3745,185) ; C11.2@3895,139.96 3800.04,139.96 3755,185 v1(3745,185) ; U12.15@4689.49,1700 4920,1700 4940.08,1679.92 C5.1@4940.08,1640 ; U11.3@5335,1344.49 C9.2@5335,1500
  TopLayer w20: v1(2520,1545) 2559.29,1505.71 U15.20@2624.13,1505.71 ; v1(2524.29,1305.71) U15.16@2624.13,1305.71 ; R42.W@2809.72,1082.52 2855,1127.8 R42.CW@2855,1240
  TopLayer w30: C17.1@2651.57,700 v1(2770.08,700) 2775.04,695.04 R3.2@2775.04,596.06 ; C59.1@2995,1575 3006.02,1563.98 C55.1@3095,1563.98 ; R2.1@3155.04,910 3163.46,901.57 v1(3320,901.57) C15.2@3540,901.57
  TopLayer w40: C57.1@2435.04,1085.83 2440.87,1080 v1(2525,1080) 2800.57,1080 2806.41,1085.83 R42.W@2809.72,1082.52 ; v1(2995,1500) C59.1@2995,1575 ; v1(3095,1175) C54.2@3095,1248.43 ; R27.2@3259.96,1225 3259.96,1170 3308.9,1121.06 C53.2@3334.96,1121.06 ; C49.2@3555.04,1121.06 v1(3555.04,1195.04) ; C18.2@3745,1000 v1(3820,1000) ; C51.1@4065.04,660 v1(4155,660) C3.1@4245,660.04 C3.1@4245,660.04 ; v1(4150,1000) C16.1@4245,1000 ; v1(4210,1640) 4241.06,1671.06 C13.2@4281.02,1671.06 ; v1(4245,195) C61.1@4245,264.96 ; R26.1@4345,589.96 v1(4459.96,589.96) ; R17.1@4345,1493.9 v1(4413.9,1493.9) ; v1(4500,220) C12.2@4574.96,220 ; v1(4631.02,1051.02) R16.1@4631.02,1121.06 ; R25.1@4790,805.04 4889.92,805.04 C14.2@4890,804.96 v1(4964.96,804.96) ; v1(4810.04,610.04) C4.1@4895,610.04 ; R18.1@4895,1114.96 R18.1@4895,1114.96 v1(4995,1115) C46.1@4995,1000 ; C5.1@4940.08,1640 v1(5005,1640) ; v1(5295,855) C7.1@5295,929.92 ; v1(5300,550) C6.1@5300,619.92 ; C9.2@5325.08,1500 5335,1500 v1(5450,1500)
  TopLayer w50: v1(4421.57,3548.43) C8.1@4580,3548.43 ; C8.1@4590,3551.57 4760,3551.57 ; C10.2@4760,3425.04 4760,3551.57 ; C2.1@4760,3674.96 4760,3551.57 ; L2.2@5145,3650 5130,3650 5031.57,3551.57 C1.2@4920,3551.57 4760,3551.57
  BottomLayer w40: v1(3820,1000) v1(4150,1000)
  BottomLayer w50: v1(4150,1000) 4150,1230 v1(4413.9,1493.9) 4421.57,1501.57 v1(4421.57,3548.43)
D0: P1.C4 U4.7 | length 419.3
  TopLayer w15: U4.7@5522.36,3375 5697,3375 P1.C4@5870,3202
D1: P1.A4 U4.6 | length 636.3
  TopLayer w15: U4.6@5522.36,3325 5682.65,3325 5851.15,3156.5 6024.5,3156.5 P1.A4@6070,3202
D2: P1.C5 U4.5 | length 419.3
  TopLayer w15: U4.5@5522.36,3275 5670,3275 5843,3102 P1.C5@5870,3102
D3: P1.A5 U4.4 | length 641.7
  TopLayer w15: U4.4@5522.36,3225 5670,3225 5845,3050 6018,3050 P1.A5@6070,3102
D4: P1.C6 U4.3 | length 419.3
  TopLayer w15: U4.3@5522.36,3175 5670,3175 5843,3002 P1.C6@5870,3002
D5: P1.A6 U4.2 | length 641.7
  TopLayer w15: U4.2@5522.36,3125 5670,3125 5845,2950 6018,2950 P1.A6@6070,3002
D6: P1.C7 U4.1 | length 419.3
  TopLayer w15: U4.1@5522.36,3075 5670,3075 5843,2902 P1.C7@5870,2902
D7: P1.A7 U4.15 | length 887.8
  TopLayer w15: U4.15@5317.64,3125 5405,3125 5505,3025 5670,3025 5845,2850 6018,2850 P1.A7@6070,2902
D8: P1.C8 U5.7 | length 400.9
  TopLayer w15: U5.7@5520,2925 5720,2925 5843,2802 P1.C8@5870,2802
D9: P1.A8 U5.6 | length 623.3
  TopLayer w15: U5.6@5520,2875 5720,2875 5845,2750 6018,2750 P1.A8@6070,2802
D10: P1.C9 U5.5 | length 400.9
  TopLayer w15: U5.5@5520,2825 5720,2825 5843,2702 P1.C9@5870,2702
D11: P1.A9 U5.4 | length 623.3
  TopLayer w15: U5.4@5520,2775 5720,2775 5845,2650 6018,2650 P1.A9@6070,2702
D12: P1.C10 U5.3 | length 400.9
  TopLayer w15: U5.3@5520,2725 5720,2725 5843,2602 P1.C10@5870,2602
D13: P1.A10 U5.2 | length 623.3
  TopLayer w15: U5.2@5520,2675 5720,2675 5845,2550 6018,2550 P1.A10@6070,2602
D14: P1.C11 U5.1 | length 400.9
  TopLayer w15: U5.1@5520,2625 5720,2625 5843,2502 P1.C11@5870,2502
D15: P1.A11 U5.15 | length 869.5
  TopLayer w15: U5.15@5315.28,2675 5395,2675 5495,2575 5720,2575 5845,2450 6018,2450 P1.A11@6070,2502
DACLK: J1.8 U15.28 | length 1081.6
  TopLayer w15: J1.8@2170,2550 2170,2450 2520,2100 2700,2100 2740,2060 2740,1940 2705.71,1905.71 U15.28@2624.13,1905.71